# Altium PCB AT42QT1010_EVK.PcbDoc
Units mm, origin at the board's own origin, x right, y up, seen from the top; angles counter-clockwise.
Board outline 40 x 20 mm, 2 copper layers (Top Layer, Bottom Layer); 14 components, 8 nets, 36 pads, 0 vias.
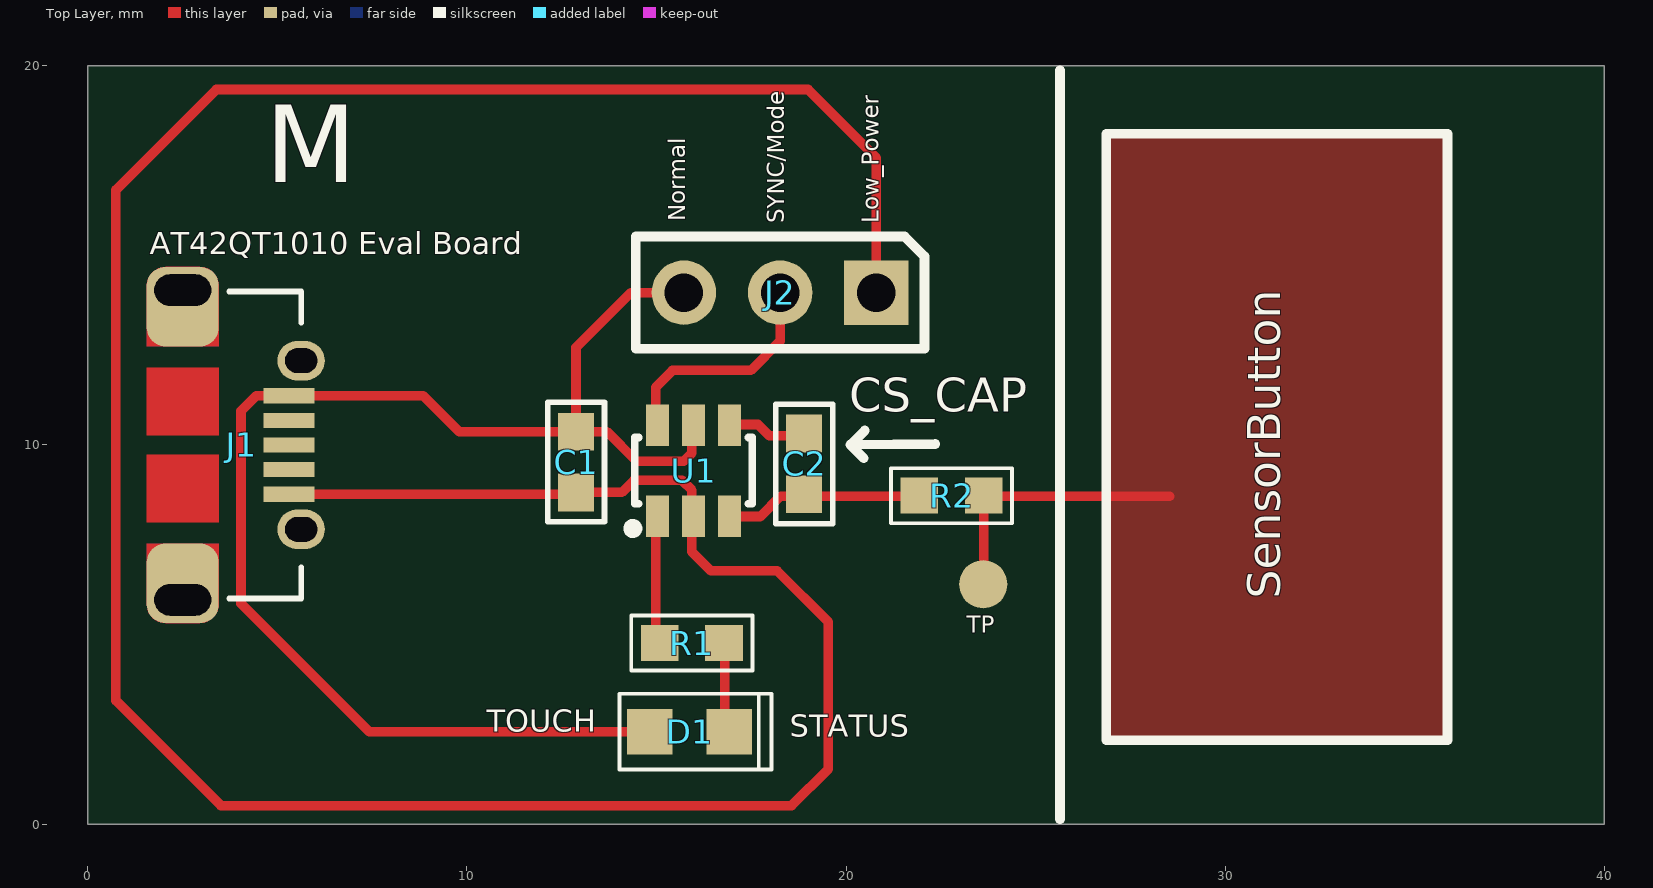
[diagram p0: Top Layer view]
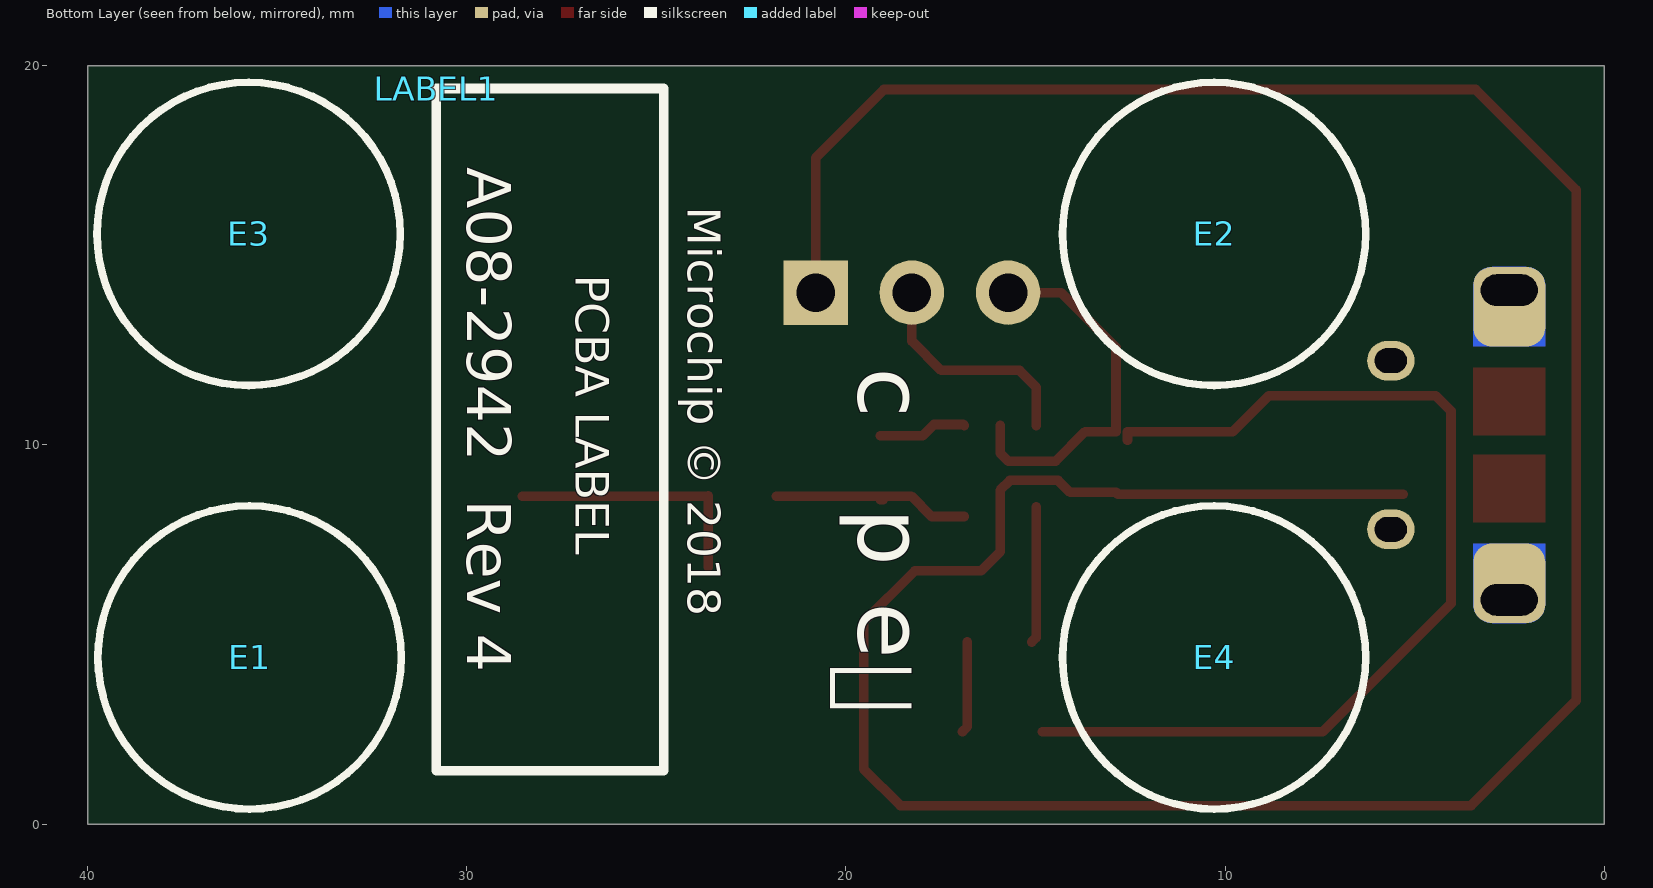
[diagram p1: Bottom Layer view, seen from below]
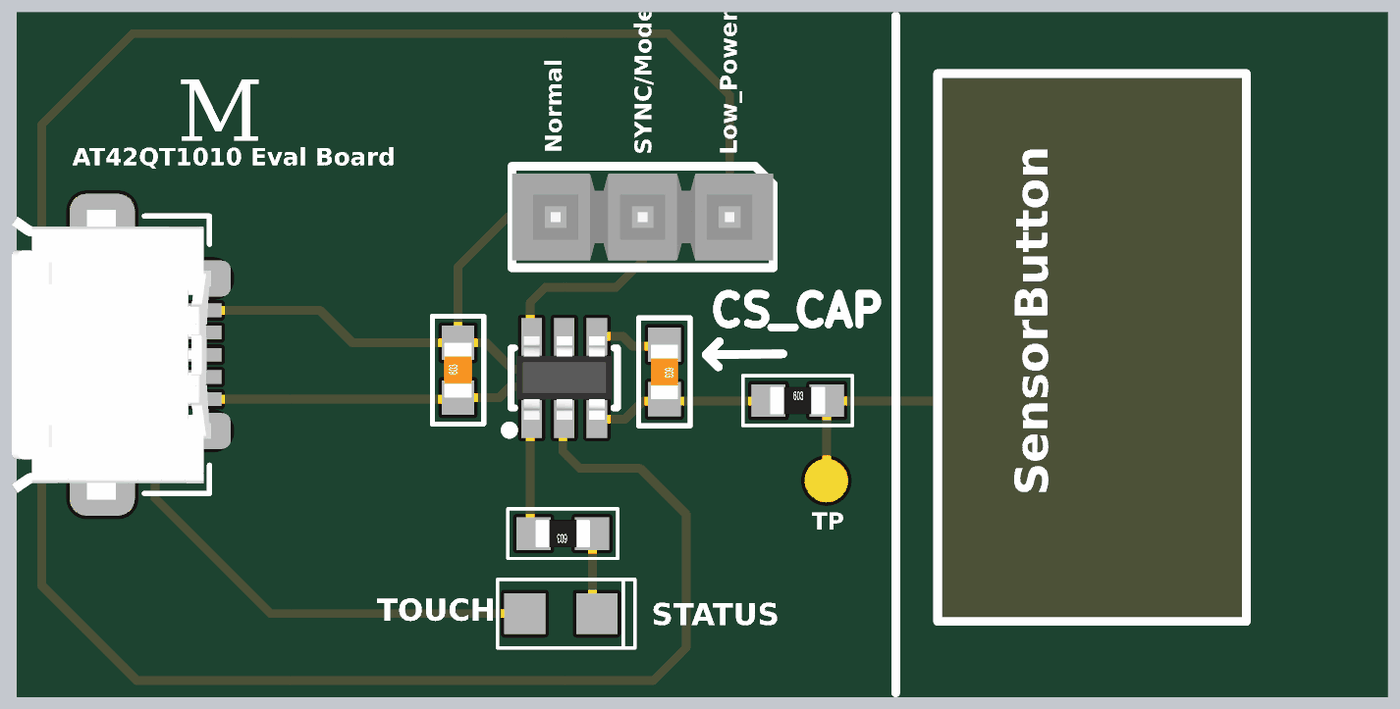
[diagram p2: 3D render of the assembled board from above, using the file's embedded part models]

## Layer stack, top to bottom
Top Solder: solder mask 0.0102, Solder Resist, Dk 3.5
Top Layer: signal copper 0.0356
Dielectric 1: dielectric 0.32, FR-4, Dk 4.8
Bottom Layer: signal copper 0.0356
Bottom Solder: solder mask 0.0102, Solder Resist, Dk 3.5

## Board outline
0,0 40,0 40,20 0,20

## Design rules (kind name [scope] priority, off if disabled: settings)
Clearance "Micro USB" [All vs InComponent('J1')] p1: gap=0.2 ignorepadtopadclearanceinfootprint=FALSE except(0: Arc-Hole Track-Hole SMDPad-Hole THPad-Hole Via-Hole Fill-Hole Poly-Hole Region-Hole Text-Hole)
Clearance [All] p2: gap=0.254 ignorepadtopadclearanceinfootprint=FALSE except(0: Arc-Hole Track-Hole SMDPad-Hole THPad-Hole Via-Hole Fill-Hole Poly-Hole Region-Hole Text-Hole)
MinimumSolderMaskSliver [All] p1: minsoldermaskwidth=0.1
PolygonConnect [All] p1: connectstyle=Relief reliefconductorwidth=0.254 reliefentries=4 polygonreliefangle="90 Angle" airgapwidth=0.254
RoutingVias [All] p1: holewidth=0.711 width=1.27 viastyle="Through Hole" minholewidth=0.711 minwidth=1.27 maxholewidth=0.711 maxwidth=1.27
SilkToSilkClearance [All] p1: silktosilkclearance=0.2
SilkToSolderMaskClearance [IsPad] p1: minsilkscreentomaskgap=0.01 clearancetoexposedcopper=TRUE
SolderMaskExpansion [All] p1: expansion=0.102
Width [All] p1: maxlimit=1.27 minlimit=0.254 preferedwidth=0.254 bottomlayer_maxwidth=0.254 minimp=50.000000 maximp=50.000000 favimp=50.000000
27 further rules are at their usual default settings.

## Components (designator, comment, footprint, x,y, rotation, side; value= is the part's Value field where it differs from the comment)
C1 "CAP-NONPOL" AP1-00002 12.878,9.55 r90 top value=100nF
C2 "CAP-NONPOL" AP1-00002 18.898,9.499 r270 top value=1nF
D1 "LED_12" AP4-00013 15.875,2.438 r180 top value=EL17-21SYGC
E1 "RUBBER FEET" AP8-00192 35.738,4.394 r180 bottom value=SJ-5076
E2 "RUBBER FEET" AP8-00192 10.287,15.57 r180 bottom value=SJ-5076
E3 "RUBBER FEET" AP8-00192 35.763,15.57 r180 bottom value=SJ-5076
E4 "RUBBER FEET" AP8-00192 10.287,4.394 r180 bottom value=SJ-5076
J1 "2,000 pieces per reel /  / NOTE! It is recommended to use low-cost version A08-2839 for new designs." AP8-00852 2.5,10 r270 top value=ZX62D-AB-5P8
J2 "HEADER 1x3" AP8-01075 18.263,14.021 r180 top value=1125-1103S0S113R1
LABEL1 "PCBA_LABEL" AP8-00317 30.81,19.406 r270 bottom value="PCBA Label"
R1 "Farnell no: 	2116604" AP2-00001 15.935,4.775 r180 top value=200R0
R2 "R2" AP2-00001 22.784,8.661 r0 top value=10k
TP "" AP8-00010 23.622,6.324 r90 top value=TESTPAD (schematic designator TP1)
U1 "AT42QT1010" AP6-00056 15.977,9.322 r90 top value=AT42QT1010-TSHR

## Footprints (in the part's own frame and the unit in brackets; to place one, negate y for a bottom-side part, rotate by r counter-clockwise, add the part's x,y. Pads: shape width x height; smd on the part's side, far side on the other; paste and mask are expansions set on the pad)
AP1-00002 [mm]
  rect 1x0.95 smd: 1(-0.8,0) 2(0.8,0)
  silkscreen extent -1.58,-0.75 1.58,0.75, body extent -0.8,-0.4 0.8,0.4, height 0.3
AP2-00001 [mm]
  rect 1x0.95 smd: 1(-0.85,0) 2(0.85,0)
  silkscreen extent -1.6,-0.72 1.6,0.72, body extent -0.8,-0.4 0.8,0.4, height 0.3
AP4-00013 [mm] "0805 diode footprint"
  rect 1.2x1.2 smd: 1(-1.05,0) 2(1.05,0)
  silkscreen extent -2.16,-1 1.85,1, body extent -1,-0.63 1,0.63, height 1.1
AP6-00056 [mm]
  rect 1.1x0.6 smd: 1(-1.2,0.95) 2(-1.2,0) 3(-1.2,-0.95) 4(1.2,-0.95) 5(1.2,0) 6(1.2,0.95)
  silkscreen extent -1.65,-1.55 0.87,1.72, body extent -1.21,-1.4 1.21,1.39, height 1.09
AP8-00010 [mm] "Testpad 50mil"
  round 1.27 smd paste-0.635: 1(0,0)
AP8-00192 [mm]
  silkscreen extent -4,-4 4,4, body extent -4,-4 4,4, height 2.79
AP8-00317 [mm] "Placement area for 18x6mm sticker"
  silkscreen extent 0,0 18,6
AP8-00852 [mm] "Hirose, ZX Series, USB Micro-AB Recept-RA"
  rect 0.4x1.35 smd: 1(-1.3,2.8) 2(-0.65,2.8) 3(0,2.8) 4(0.65,2.8) 5(1.3,2.8)
  rrect52% 2.1x1.9 hole 0.825 slot 1.5 at 90 deg copper offset 0.437,0: 6(-4.088,0)
  rrect50% 2.1x1.9 on Top Paste: 6(-3.6,0) 7(3.6,0)
  rrect52% 2.1x1.9 hole 0.825 slot 1.5 at 90 deg copper offset -0.437,0: 7(4.088,0)
  rrect100% 1.05x1.25 hole 0.65 slot 0.85 at 90 deg: 8(-2.225,3.125) 9(2.225,3.125)
  rrect50% 1.05x1.25 on Top Paste: 8(-2.225,3.125) 9(2.225,3.125)
  Top Layer region: -2.049,-0.95 -0.249,-0.95 -0.249,0.95 -2.049,0.95
  Top Layer region: 0.249,-0.95 2.049,-0.95 2.049,0.95 0.249,0.95
  Top Layer pour cut-out: -3.75,1.975 3.75,1.975 3.75,-1.325 -3.75,-1.325
  Top Layer region: -2.6,0.95 -4.2,0.95 -4.294,0.941 -4.381,0.915 -4.434,0.891 -4.48,0.862 -4.52,0.832 -4.565,0.791 -4.596,0.753 -4.622,0.716 -4.647,0.673 -4.66,0.64 -4.676,0.6 -4.688,0.55 -4.696,0.505 -4.7,0.45 -4.7,-0.45 -4.696,-0.503 -4.689,-0.548 -4.677,-0.599 -4.661,-0.641 -4.641,-0.683 -4.617,-0.724 -4.589,-0.761 -4.56,-0.797 -4.521,-0.831 -4.483,-0.86 -4.439,-0.888 -4.397,-0.908 -4.354,-0.924 -4.301,-0.939 -4.248,-0.946 -4.2,-0.95 -2.6,-0.95
  Top Layer region: 2.6,-0.95 4.2,-0.95 4.294,-0.941 4.381,-0.915 4.434,-0.891 4.48,-0.862 4.52,-0.832 4.565,-0.791 4.596,-0.753 4.622,-0.716 4.647,-0.673 4.66,-0.64 4.676,-0.6 4.688,-0.55 4.696,-0.505 4.7,-0.45 4.7,0.45 4.696,0.503 4.689,0.548 4.677,0.599 4.661,0.641 4.641,0.683 4.617,0.724 4.589,0.761 4.56,0.797 4.521,0.831 4.483,0.86 4.439,0.888 4.397,0.908 4.354,0.924 4.301,0.939 4.248,0.946 4.2,0.95 2.6,0.95
  Bottom Layer region: 2.6,-0.95 4.2,-0.95 4.294,-0.941 4.381,-0.915 4.434,-0.891 4.48,-0.862 4.52,-0.832 4.565,-0.791 4.596,-0.753 4.622,-0.716 4.647,-0.673 4.66,-0.64 4.676,-0.6 4.688,-0.55 4.696,-0.505 4.7,-0.45 4.7,0.45 4.696,0.503 4.689,0.548 4.677,0.599 4.661,0.641 4.641,0.683 4.617,0.724 4.589,0.761 4.56,0.797 4.521,0.831 4.483,0.86 4.439,0.888 4.397,0.908 4.354,0.924 4.301,0.939 4.248,0.946 4.2,0.95 2.6,0.95
  Bottom Layer region: -2.6,0.95 -4.2,0.95 -4.294,0.941 -4.381,0.915 -4.434,0.891 -4.48,0.862 -4.52,0.832 -4.565,0.791 -4.596,0.753 -4.622,0.716 -4.647,0.673 -4.66,0.64 -4.676,0.6 -4.688,0.55 -4.696,0.505 -4.7,0.45 -4.7,-0.45 -4.696,-0.503 -4.689,-0.548 -4.677,-0.599 -4.661,-0.641 -4.641,-0.683 -4.617,-0.724 -4.589,-0.761 -4.56,-0.797 -4.521,-0.831 -4.483,-0.86 -4.439,-0.888 -4.397,-0.908 -4.354,-0.924 -4.301,-0.939 -4.248,-0.946 -4.2,-0.95 -2.6,-0.95
  silkscreen extent -4.05,1.22 4.05,3.13, body extent -4.32,-2.65 4.33,3.25, height 2.78
AP8-01075 [mm] "THM Pin-header 1x3 100mil pitch, Pick plate"
  rect 1.7x1.7 / inner round 1.7 / far side rect 1.7x1.7 hole 1.02: 1(-2.54,0)
  rect 2.1x2.1 on Top Paste: 1(-2.54,0) 2(0,0) 3(2.54,0)
  round 1.7 hole 1.02: 2(0,0) 3(2.54,0)
  silkscreen extent -3.81,-1.48 3.81,1.48, body extent -3.81,-1.27 3.81,1.27, height 8.38

## Part data
C1: library part A01-0367, "Ceramic capacitor, SMD 0603, X7R, 50V, ±10 %", Manufacturer=AVX, MPN=06035C104KAT2A, AN=A01-0367, ComponentStatus="'Active (verified)'", FootprintStatus="'Active (Verified)'", Height=0.899999976158142, PartGroup="Capacitors,Ceramic,SMD 0603", Status=Active, Verified by="Lars Helge Mo", Verified date=2005-12-15
C2: library part A01-0675, "Ceramic capacitor, SMD 0603, X7R, 50V, 10 %", Manufacturer=Multicomp, MPN=MC0603N102J500CT, TemperatureRange="-55 to +125 deg C", Tolerance=10%, AN=A01-0675, ComponentStatus="'Active (verified)'", FootprintStatus="'Active (Verified)'", Height=0.899999976158142, PartGroup="Capacitors,Ceramic,SMD 0603", Status=Active, Verified by="Lars Helge Mo", Verified date=2005-12-15
D1: library part A10-0018, "LED, Green, Wave length=575nm, SMD 0805, ±70°", Manufacturer=Everlight, MPN=EL17-21SYGC, TemperatureRange="-40 - +85 deg C", AN=A10-0018, ComponentStatus="'Active (verified)'", FootprintStatus="'Active (Verified)'", Height=1.10000002384186, PartGroup=Opto,LEDs,SMD, Status=Active, Verified by="Sveinung Helgeland", Verified date=2006-02-17
E1 E2 E3 E4: library part A08-0053, "2.8mm adhesive feet,diam 8.0mm", Manufacturer=3M, MPN=SJ-5076, AN=A08-0053, ComponentStatus="'Active (verified)'", FootprintStatus="'Active (Verified)'", Height=2,79999995231628, PartGroup="Mechanical devices,Mounting accessories", Status=Active, Verified by="Ketil Skjerve", Verified date=2006-05-05
J1: library part A08-2112, "Micro USB AB Connector, Standard SMT + DIP", Manufacturer=HIROSE, MPN=ZX62D-AB-5P8(30), AN=A08-2112, ComponentStatus="'Active (verified)'", FootprintStatus="'Active (Verified)'", Height=2.79999995231628, PartGroup="Mechanical devices,Connectors,USB", Status=Active, Verified by="Eirik Rasmussen", Verified date=2006-05-18
J2: library part A08-2783, "1x3 pin header, 2.54mm pitch, Pin-in-Paste THM", Manufacturer="WCON HARDWARE ELECTRONICS CO., LTD", MPN=1125-1103S0S113R1, TemperatureRange="-40°C to +105°C", AN=A08-2783, ComponentStatus="'Active (verified)'", FootprintStatus="'Active (Verified)'", Height=9, PartGroup="Mechanical devices,Connectors,Pin headers", Status=Active, Verified by="Lars Helge Mo", Verified date=2006-01-30
LABEL1: library part A09-0611, "PCBA identification label PP Top White Gloss", Manufacturer="ACT Logimark AS", MPN=505462, AN=A09-0611, ComponentStatus="'Active (verified)'", FootprintStatus="'Active (Verified)'", PartGroup="Mechanical devices,Packaging materials,Printed Labels", Status=New
R1: library part A02-1114, "Thin film resistor, SMD 0603, 166mW, 0.1%, 0603", Manufacturer="TE Connectivity", MPN=RP73PF1J200RBTDF, TemperatureRange="-55°C to +155°C", Tolerance=±0.1%, AN=A02-1114, ComponentStatus="'Active (verified)'", FootprintStatus="'Active (Verified)'", Height=0.449999988079071, PartGroup="Resistors,Metal film,SMD Precision resistors", Status=Active, Verified by="Lars Helge Mo", Verified date=2005-12-19
R2: library part A02-0098, "Thick film resistor, SMD 0603, 1/10W, 1%", Manufacturer=KOA, MPN=RK73H1JTTD1002F, Tolerance="1 %", AN=A02-0098, ComponentStatus="'Active (verified)'", FootprintStatus="'Active (Verified)'", Height=0.5, PartGroup="Resistors,SMD,0603 1%", Status=Active, Verified by="Lars Helge Mo", Verified date=2005-12-19
TP: library part A08-0004, "Single SMD testpad", AN=A08-0004, ComponentStatus="'Active (verified)'", FootprintStatus="'Active (Verified)'", Height=0, PartGroup="Mechanical devices,Connectors,Test points", Status=Active, Verified by="Sveinung Helgeland", Verified date=2006-02-17
U1: library part A06-0669, "1ch QTouch Sensor IC", Manufacturer=ATMEL, MPN=AT42QT1010-TSHR, AN=A06-0669, ComponentStatus="'Active (verified)'", FootprintStatus="'Active (Verified)'", Height=1.45000004768372, PartGroup="Integrated Circuits,Special function,Touch Sense", Status=Active, Verified by=vlarsen, Verified date=2011.05.12

## Nets (pads, with @x,y where several pads share a name; then routed paths per layer and width w, separated by ;. In a path a pad name is that pad's centre, name@x,y a point inside that pad or via, vN(x,y) a via of type N, cw(c..) or ccw(c..) an arc to the next point about the centre after c; other vN are vias at no path point)
GND: C1.1 J1.5 J2.1@20.803,14.021 U1.2 | length 80.1
  Top Layer w0.254: J1.5 12.827,8.7 C1.1 14.084,8.75 14.402,9.068 15.672,9.068 15.932,8.808 15.932,7.182 16.434,6.68 18.186,6.68 19.533,5.334 19.533,1.448 18.567,0.483 3.51,0.483 0.737,3.256 0.737,16.728 3.388,19.38 18.999,19.38 20.803,17.577 J2.1@20.803,14.021
NetC1_2: C1.2 D1.2 J1.1 J2.3@15.723,14.021 U1.5 | length 36.4
  Top Layer w0.254: C1.2@12.573,10.122 12.573,10.35 9.792,10.35 8.842,11.3 J1.1 4.442,11.3 4.039,10.897 4.039,5.817 7.417,2.438 D1.2 ; J2.3@15.723,14.021 14.326,14.021 12.878,12.573 C1.2 13.691,10.35 14.465,9.576 15.723,9.576 15.932,9.785 U1.5@15.932,10.514
NetC2_1: C2.1 U1.4 | length 2.4
  Top Layer w0.254: U1.4@16.882,10.514 16.909,10.541 17.678,10.541 17.971,10.249 C2.1@19.101,10.249
NetC2_2: C2.2 R2.1 U1.3 | length 5.3
  Top Layer w0.254: U1.3@16.882,8.114 17.741,8.114 18.275,8.649 19.101,8.649 R2.1@21.845,8.649 ; C2.2@19.025,8.56 C2.2@19.101,8.56
NetD1_1: D1.1 R1.1 | length 2.4
  Top Layer w0.254: R1.1@16.801,4.801 16.801,2.562 D1.1
NetJ2_2: J2.2@18.263,14.021 U1.6 | length 6.1
  Top Layer w0.254: U1.6@14.982,10.514 14.982,11.527 15.423,11.968 17.492,11.968 18.263,12.739 J2.2@18.263,14.021
NetR1_2: R1.2 U1.1 | length 3.6
  Top Layer w0.254: U1.1@14.982,8.368 14.982,8.114 14.982,4.92 R1.2@15.101,4.801
NetR2_2: R2.2 TP.1 | length 6.8
  Top Layer w0.254: TP.1@23.634,6.782 R2.2@23.634,8.649 ; R2.2 R2.2@23.634,8.649 ; 28.537,8.649 R2.2@23.634,8.649
pads on no net: J1.2 J1.3 J1.4 J1.6 J1.7 J1.8 J1.9 J2.1@20.803,14.021 J2.2@18.263,14.021 J2.3@15.723,14.021

## Polygon pours and split planes (outlines as drawn)
NetR2_2 on Top Layer "CS1" (solid, pour order 22): 26.87,18.211 35.87,18.211 35.87,2.211 26.87,2.211 26.87,18.211

## Silkscreen, mask and mechanical layers (free items; w line width, h text height)
Top Overlay:
  lines w0.254: 20.142,10.027 20.498,10.383 ; 20.472,9.646 20.117,10.002 22.352,10.027 ; 25.646,0.127 25.646,19.888 ; 26.87,2.211 35.87,2.211 35.87,18.211 26.87,18.211 26.87,2.211
  text "M" at 4.674,16.256 h3.5
  text "Normal" at 15.9,15.9 h0.76 r90
  text "SYNC/Mode" at 18.517,15.85 h0.76 r90
  text "Low_Power" at 21.006,15.849 h0.76 r90
  text "AT42QT1010 Eval Board" at 1.624,14.833 h1
  text "CS_CAP" at 20.091,10.871 h0.9
  text "SensorButton" at 31.75,5.943 h1.5 r90
  text "TOUCH" at 10.516,2.235 h1
  text "STATUS" at 18.517,2.108 h1
Bottom Overlay:
  text "A08-2942  Rev 4" at 30.378,17.323 h2 r90
  text "Microchip © 2018" at 24.46,16.281 h1.5 r90
  text "c" at 20.244,12.04 h3 r90
  text "p" at 20.244,8.331 h3 r90
  text "e" at 20.244,5.842 h3 r90
  text "" at 21.361,4.242 h5 r90
Mechanical 1:
  the board outline again, w0.254

## Text inside footprints (layer, text, board x,y; h text height)
LABEL1: Bottom Overlay "PCBA LABEL" at 27.415,14.497 h1.52 r90